# EAGLE board atx-psu-breakout (EAGLE 5.07)
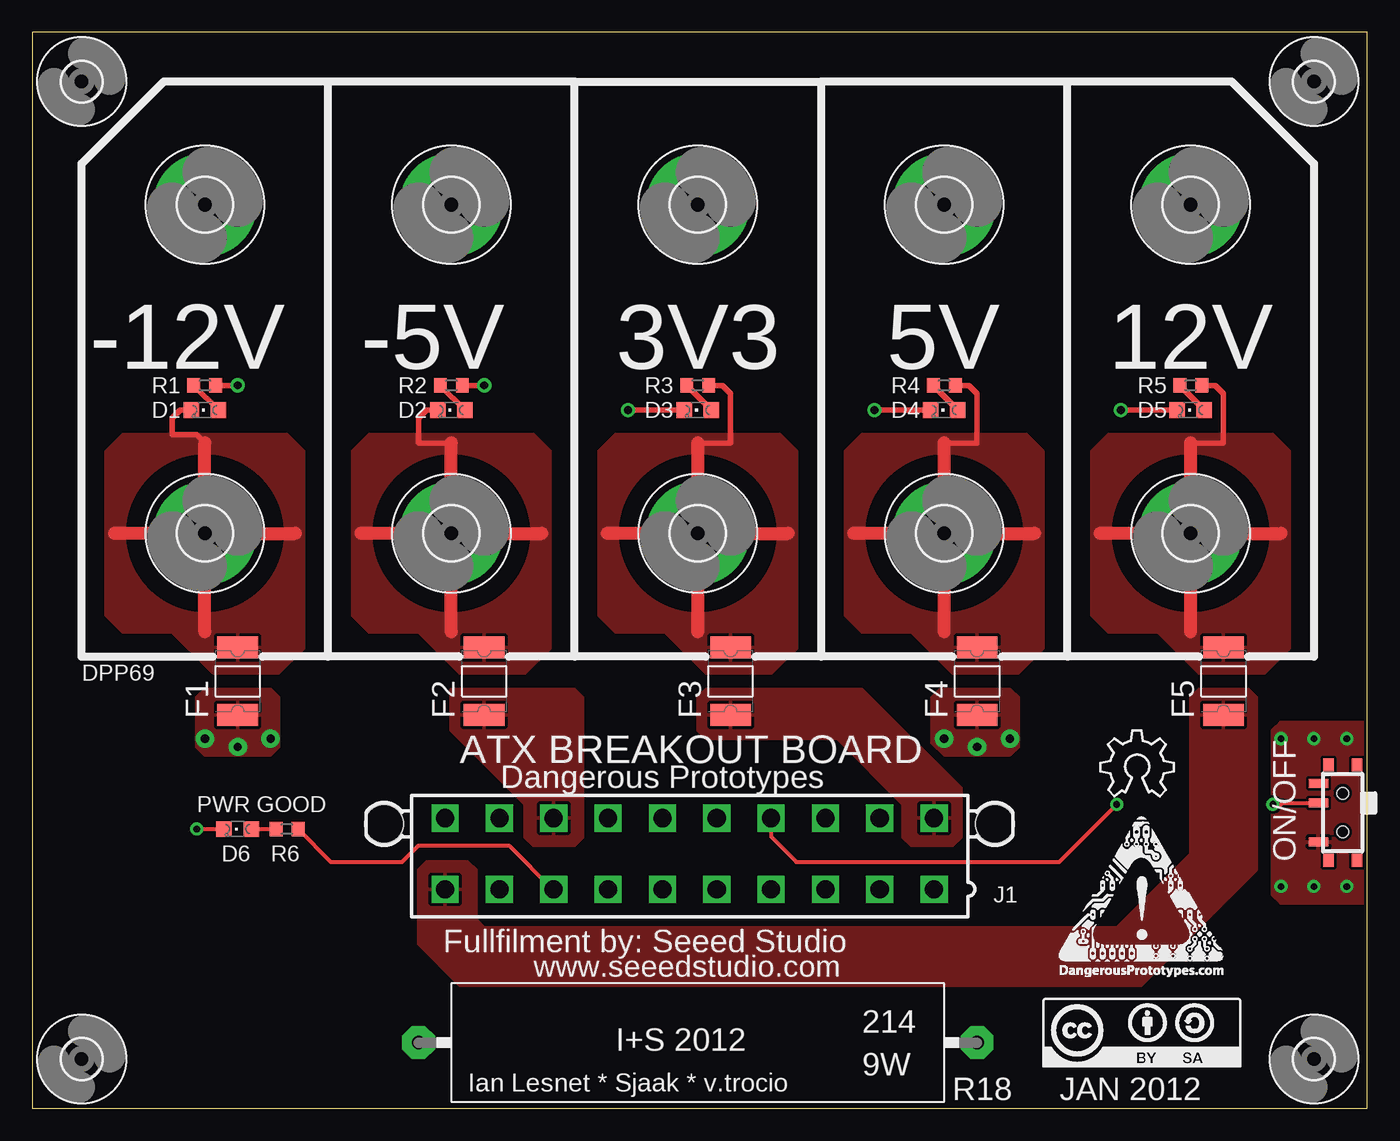
[diagram p0: board, top side]
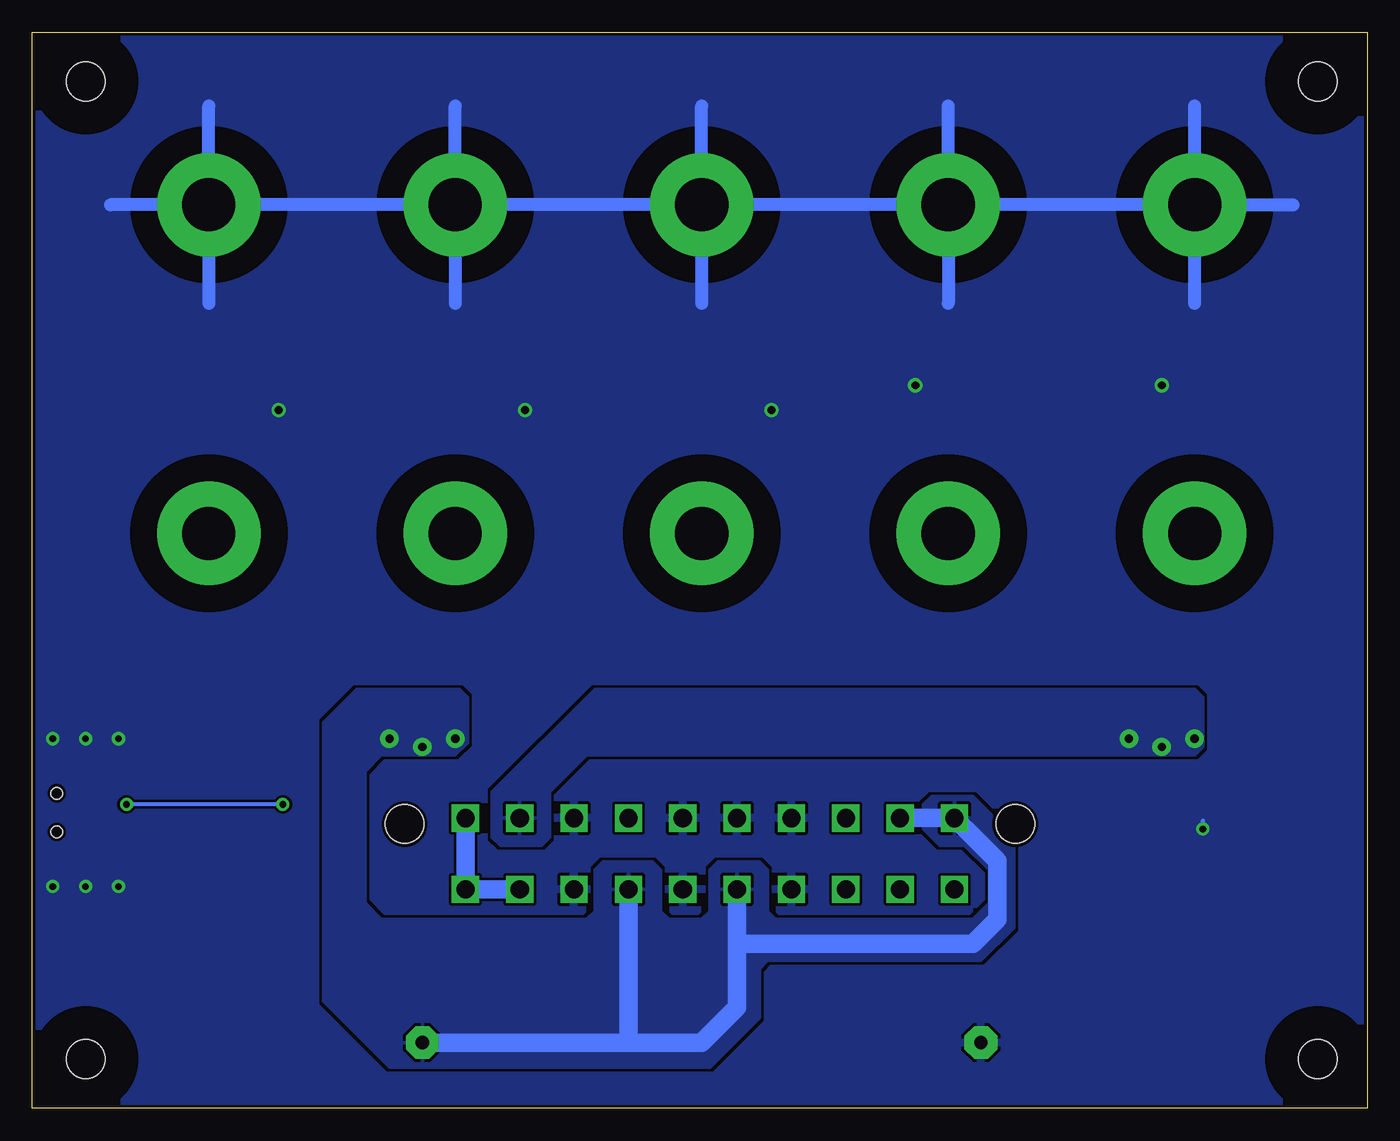
[diagram p1: board, bottom side, seen from below]

Size 103.17 x 83.17 mm. Coordinates in mm from the lower left corner, seen from the top.
Outline: 0,0 103.17,0 103.17,83.17 0,83.17 0,0
Copper layers (1*16): Top 0.035mm / dielectric 1.5mm / Bottom 0.035mm
Design rules "SparkFun": minimum track width 8mil, minimum drill 20mil, track to track 8mil, track to pad 8mil, pad to pad 8mil, via to via 8mil, smd to smd 8mil, copper to edge 10mil, drill to drill 8mil, minimum pad ring 12mil, minimum via ring 10mil, stop-mask expansion 4mil, vias tented up to drill 25mil, thermal gap 10mil

## Footprints (pad centres in the part's own frame; a part is rotated, then mirrored left to right if it is on the bottom)
LED-805 = smd 1.2 x 1.2: A 0,-1.05; C 0,1.05
1812L_PTC = smd 1.7 x 3.15: 1 -2.62,0; 2 2.62,0
4,1-PAD = drill 4.1 pad 8 round: B4,1 0,0
3,0 = hole 3: 0,0
5566-20 = drill 1.4 square: 1 18.9,-2.75; 2 14.7,-2.75; 3 10.5,-2.75; 4 6.3,-2.75; 5 2.1,-2.75; 6 -2.1,-2.75; 7 -6.3,-2.75; 8 -10.5,-2.75; 9 -14.7,-2.75; 10 -18.9,-2.75; 11 18.9,2.75; 12 14.7,2.75; 13 10.5,2.75; 14 6.3,2.75; 15 2.1,2.75; 16 -2.1,2.75; 17 -6.3,2.75; 18 -10.5,2.75; 19 -14.7,2.75; 20 -18.9,2.75 | hole 3: 23.6,2.29; -23.6,2.29
SLIDE_SWITCH_SMD = smd 0.7 x 1.5: COM 0.75,1.875; NC 2.25,1.875; NO -2.25,1.875 | smd 1 x 0.8: P$1 -3.7,-1.1; P$2 -3.7,1.1; P$3 3.7,1.1; P$4 3.7,-1.1 | hole 0.9: -1.5,0; 1.5,0
R603 = smd 1 x 1.1: 1 -0.85,0; 2 0.85,0
KH214-8 = drill 1.016 pad 2.54 octagon: 1 -21.59,0; 2 21.59,0

## Placement (x,y rotation side)
D1  [LED-805]  13.33,53.98 90 top
D2  [LED-805]  32.38,53.98 90 top
D3  [LED-805]  51.44,53.98 90 top
D4  [LED-805]  70.48,53.98 90 top
D5  [LED-805]  89.53,53.98 90 top
D6  [LED-805]  15.88,21.59 90 top
F1  0.5A  [1812L_PTC]  15.88,33.02 90 top
F2  0.5A  [1812L_PTC]  34.93,33.02 90 top
F3  0.5A  [1812L_PTC]  53.98,33.02 90 top
F4  0.5A  [1812L_PTC]  73.03,33.02 90 top
F5  0.5A  [1812L_PTC]  92.08,33.02 90 top
H1  MOUNT-PAD-ROUND4.1  [4,1-PAD]  32.38,69.85 0 top
H2  MOUNT-PAD-ROUND4.1  [4,1-PAD]  51.44,69.85 0 top
H3  MOUNT-PAD-ROUND4.1  [4,1-PAD]  70.48,69.85 0 top
H4  MOUNT-PAD-ROUND4.1  [4,1-PAD]  89.53,69.85 0 top
H5  MOUNT-PAD-ROUND4.1  [4,1-PAD]  13.33,69.85 0 top
H6  MOUNT-PAD-ROUND4.1  [4,1-PAD]  89.53,44.45 0 top
H7  MOUNT-PAD-ROUND4.1  [4,1-PAD]  70.48,44.45 0 top
H8  MOUNT-PAD-ROUND4.1  [4,1-PAD]  51.44,44.45 0 top
H9  MOUNT-PAD-ROUND4.1  [4,1-PAD]  32.38,44.45 0 top
H10  MOUNT-PAD-ROUND4.1  [4,1-PAD]  13.33,44.45 0 top
H11  MOUNT-HOLE3.0  [3,0]  3.81,3.81 0 top
H12  MOUNT-HOLE3.0  [3,0]  99.06,3.81 0 top
H13  MOUNT-HOLE3.0  [3,0]  3.81,79.38 0 top
H14  MOUNT-HOLE3.0  [3,0]  99.06,79.38 0 top
J1  5566-20  [5566-20]  50.8,19.68 0 top
ON/OFF  SLIDE_SWITCH_SMD  [SLIDE_SWITCH_SMD]  101.28,22.86 90 top
R1  [R603]  13.33,55.88 0 top
R2  [R603]  32.38,55.88 0 top
R3  [R603]  51.44,55.88 0 top
R4  [R603]  70.48,55.88 0 top
R5  [R603]  89.53,55.88 0 top
R6  [R603]  19.69,21.59 0 top
R18  [KH214-8]  51.44,5.08 0 top
U$1  DINA4_L  [DP_LOGO]  3.81,-7.62 0 top  (outside the outline)
U$2  [DP_LOGO_ART_0.5X0.5]  79.38,10.16 0 top
U$3  [CC-BY-SA]  78.11,3.17 0 top
U$4  [OSHW_8X200_NOTEXT]  82.55,24.13 0 top

## Library data of the parts
D1-D6 F1-F5 ON/OFF R1-R6 U$2 U$3 = dp_devices
H1-H14 = holes
J1 = con-molex
R18 = resistor-power
U$1 = dp_devices; FF1: fulfillment by; FF2: Seeed Studio; FF3: www.seeedstudio.com; LICENSE: CC-BY-SA; PROJECT: ATX PSU BREAKOUT; URL1: http://; URL2: DangerousPrototypes.com
U$4 = ohw-logo

## Nets
3V3OUT: F3.2 H8.B4,1 R3.2
5VOUT: F4.2 H7.B4,1 R4.2
5VSB: J1.9
12VOUT: F5.2 H6.B4,1 R5.2
+3V3: F3.1 J1.1 J1.2 J1.11
+5V: F4.1 J1.4 J1.6 J1.19 J1.20 R18.2
+12V: F5.1 J1.10
-5V: F2.1 J1.18
-5VOUT: D2.C F2.2 H9.B4,1
-12V: F1.1 J1.12
-12VOUT: D1.C F1.2 H10.B4,1
GND: D3.C D4.C D5.C D6.C H1.B4,1 H2.B4,1 H3.B4,1 H4.B4,1 H5.B4,1 J1.3 J1.5 J1.7 J1.13 J1.15 J1.16 J1.17 ON/OFF.NO R1.2 R2.2 R18.1
N$2: D6.A R6.1
N$15: D5.A R5.1
N$16: D4.A R4.1
N$18: D1.A R1.1
N$19: D3.A R3.1
N$20: D2.A R2.1
PG: J1.8 R6.2
PWR_ON: J1.14 ON/OFF.COM

## Tracks (layer width: path | path; a pad name or v marks a point on that pad's centre or on a via)
3V3OUT
  Top 0.406: R3.2 53.34,55.88 53.98,55.24 53.98,51.44 51.44,51.44
  Top 1.016: H8.B4,1 51.44,51.44 | H8.B4,1 44.45,44.45 | H8.B4,1 58.42,44.45 | 51.44,36.83 H8.B4,1
  pour Top: 43.81,50.8 45.09,52.07 57.79,52.07 59.05,50.8 59.05,35.56 57.15,33.66 52.07,33.66 48.9,36.83 45.09,36.83 43.81,38.1
5VOUT
  Top 0.406: R4.2 72.39,55.88 73.03,55.24 73.03,51.44 70.48,51.44
  Top 1.016: H7.B4,1 70.48,51.44 | H7.B4,1 63.5,44.45 | H7.B4,1 77.47,44.45 | 70.48,36.83 H7.B4,1
  pour Top: 62.87,50.8 64.13,52.07 76.84,52.07 78.11,50.8 78.11,35.56 76.2,33.66 71.12,33.66 67.95,36.83 64.13,36.83 62.87,38.1
12VOUT
  Top 0.406: R5.2 91.44,55.88 92.08,55.24 92.08,51.44 89.53,51.44
  Top 1.016: H6.B4,1 89.53,51.44 | H6.B4,1 82.55,44.45 | H6.B4,1 96.52,44.45 | 89.53,36.83 H6.B4,1
  pour Top: 81.92,50.8 83.19,52.07 95.89,52.07 97.16,50.8 97.16,35.56 95.25,33.66 90.17,33.66 87,36.83 83.19,36.83 81.92,38.1
+3V3
  Bottom 1.422: J1.11 J1.1 J1.2
  pour Top: 52.07,32.38 64.13,32.38 71.75,24.77 71.75,20.95 71.12,20.32 67.95,20.32 67.31,20.95 67.31,23.5 62.23,28.57 52.07,28.57 51.44,29.21 51.44,31.75
+5V  (via drill 0.64 pad 1.42)
  Bottom 1.422: 57.15,5.08 51.44,5.08 48.7,7.82 J1.6 48.7,13.14 48.26,12.7 30.48,12.7 28.58,14.61 28.58,19.11 J1.20 J1.19 | 57.15,5.08 R18.2 | J1.4 57.1,5.13 57.15,5.08
  other vias: 75.56,28.57 70.48,28.57 73.03,27.94
  pour Bottom: 69.53,31.75 70.17,32.38 78.11,32.38 80.64,29.84 80.64,8.26 75.56,3.17 50.8,3.17 46.99,6.99 46.99,10.79 46.36,11.43 29.85,11.43 27.3,13.97 27.3,20.95 30.48,24.13 33.66,24.13 34.29,23.5 34.29,21.59 33.02,20.32 31.12,20.32 29.21,18.41 29.21,15.88 30.48,14.61 45.72,14.61 46.36,15.24 46.36,18.41 46.99,19.05 50.16,19.05 50.8,18.41 50.8,15.24 51.44,14.61 53.98,14.61 54.61,15.24 54.61,18.41 55.25,19.05 59.05,19.05 59.69,18.41 59.69,15.24 60.33,14.61 76.2,14.61 77.47,15.88 77.47,26.04 76.2,27.3 70.48,27.3 69.53,28.26
  pour Top: 70.17,32.38 75.56,32.38 76.2,31.75 76.2,27.94 75.56,27.3 70.48,27.3 69.53,28.26 69.53,31.75
+12V
  pour Top: 30.48,19.05 33.66,19.05 34.29,18.41 34.29,14.61 34.93,13.97 83.82,13.97 89.53,19.68 89.53,31.75 90.17,32.38 93.98,32.38 94.61,31.75 94.61,18.41 85.72,9.53 33.02,9.53 29.85,12.7 29.85,18.41
-5V
  pour Top: 32.38,32.38 41.91,32.38 42.55,31.75 42.55,20.95 41.91,20.32 38.73,20.32 38.1,20.95 38.1,23.5 32.38,29.21
-5VOUT
  Top 0.406: D2.C 30.48,53.98 29.85,53.34 29.85,51.44 32.38,51.44
  Top 1.016: H9.B4,1 32.38,51.44 | H9.B4,1 25.4,44.45 | H9.B4,1 39.37,44.45 | 32.38,36.83 H9.B4,1
  pour Top: 24.77,50.8 26.04,52.07 38.73,52.07 40.01,50.8 40.01,35.56 38.1,33.66 33.02,33.66 29.85,36.83 26.04,36.83 24.77,38.1
-12V  (via drill 0.64 pad 1.42)
  other vias: 18.42,28.57 15.88,27.94 13.33,28.57
  pour Bottom: 12.7,31.75 13.33,32.38 59.69,32.38 67.63,24.45 67.63,20.95 66.99,20.32 63.82,20.32 63.18,20.95 63.18,24.45 60.33,27.3 13.33,27.3 12.7,27.94
  pour Top: 12.7,31.75 13.33,32.38 18.42,32.38 19.05,31.75 19.05,27.94 18.42,27.3 13.33,27.3 12.7,27.94
-12VOUT
  Top 0.406: D1.C 11.43,53.98 10.79,53.34 10.79,52.07 12.7,52.07 13.33,51.44
  Top 1.016: H10.B4,1 13.33,51.44 | H10.B4,1 6.35,44.45 | H10.B4,1 20.32,44.45 | 13.33,36.83 H10.B4,1
  pour Top: 5.71,50.8 6.99,52.07 19.69,52.07 20.96,50.8 20.96,35.56 19.05,33.66 13.97,33.66 10.79,36.83 6.99,36.83 5.71,38.1
GND  (via drill 0.51, 0.6)
  Top 0.305: v12.7,21.59 D6.C
  Top 0.406: R1.2 v15.88,55.88 | R2.2 v34.93,55.88 | v46.04,53.98 D3.C | v65.09,53.98 D4.C | v84.14,53.98 D5.C
  Bottom 0.305: v12.7,21.59 12.7,22.23
  Bottom 1.016: H5.B4,1 5.71,69.85 | H5.B4,1 13.33,77.47 | 13.33,62.23 H5.B4,1 | H5.B4,1 H1.B4,1 | H1.B4,1 32.38,77.47 | H1.B4,1 32.38,62.23 | H1.B4,1 H2.B4,1 | H2.B4,1 51.44,77.47 | H2.B4,1 51.44,62.23 | H2.B4,1 H3.B4,1 | H3.B4,1 70.48,77.47 | H3.B4,1 70.48,62.23 | H4.B4,1 97.16,69.85 | H4.B4,1 89.53,77.47 | H4.B4,1 89.53,62.23 | H3.B4,1 H4.B4,1
  other vias: 96.52,28.57 99.06,28.57 101.6,28.57 101.6,17.14 99.06,17.14 96.52,17.14
  pour Bottom (rank 6): 0,83.19 0,0 102.87,0 102.87,83.19
  pour Top: 96.52,29.84 102.87,29.84 102.87,15.88 96.52,15.88 95.89,16.51 95.89,29.21
N$2
  Top 0.305: D6.A R6.1
N$15
  Top 0.406: R5.1 D5.A
N$16
  Top 0.406: R4.1 D4.A
N$18
  Top 0.406: R1.1 D1.A
N$19
  Top 0.406: R3.1 D3.A
N$20
  Top 0.406: R2.1 D2.A
PG
  Top 0.305: J1.8 40.22,16.93 36.83,20.32 29.85,20.32 28.58,19.05 23.08,19.05 R6.2
PWR_ON  (via drill 0.51)
  Top 0.305: J1.14 57.1,21 59.05,19.05 79.38,19.05 v83.82,23.5 | v95.89,23.5 96.52,23.5 96.64,23.61 ON/OFF.COM
  Bottom 0.305: v83.82,23.5 v95.89,23.5

## Text on the board
tPlace: -12V | -5V | 3V3 | 5V | 12V
tNames: DPP69 | ATX BREAKOUT BOARD | Dangerous Prototypes | PWR GOOD | Fullfilment by: Seeed Studio | www.seeedstudio.com | I+S 2012 | Ian Lesnet * Sjaak * v.trocio | JAN 2012